# Altium PCB PCB.PcbDoc
Units mil, origin at the board's own origin, x right, y up, seen from the top; angles counter-clockwise.
Board outline 1586.38 x 1777.43 mil, 2 copper layers (Top Layer, Bottom Layer); 48 components, 31 nets, 178 pads, 66 vias.
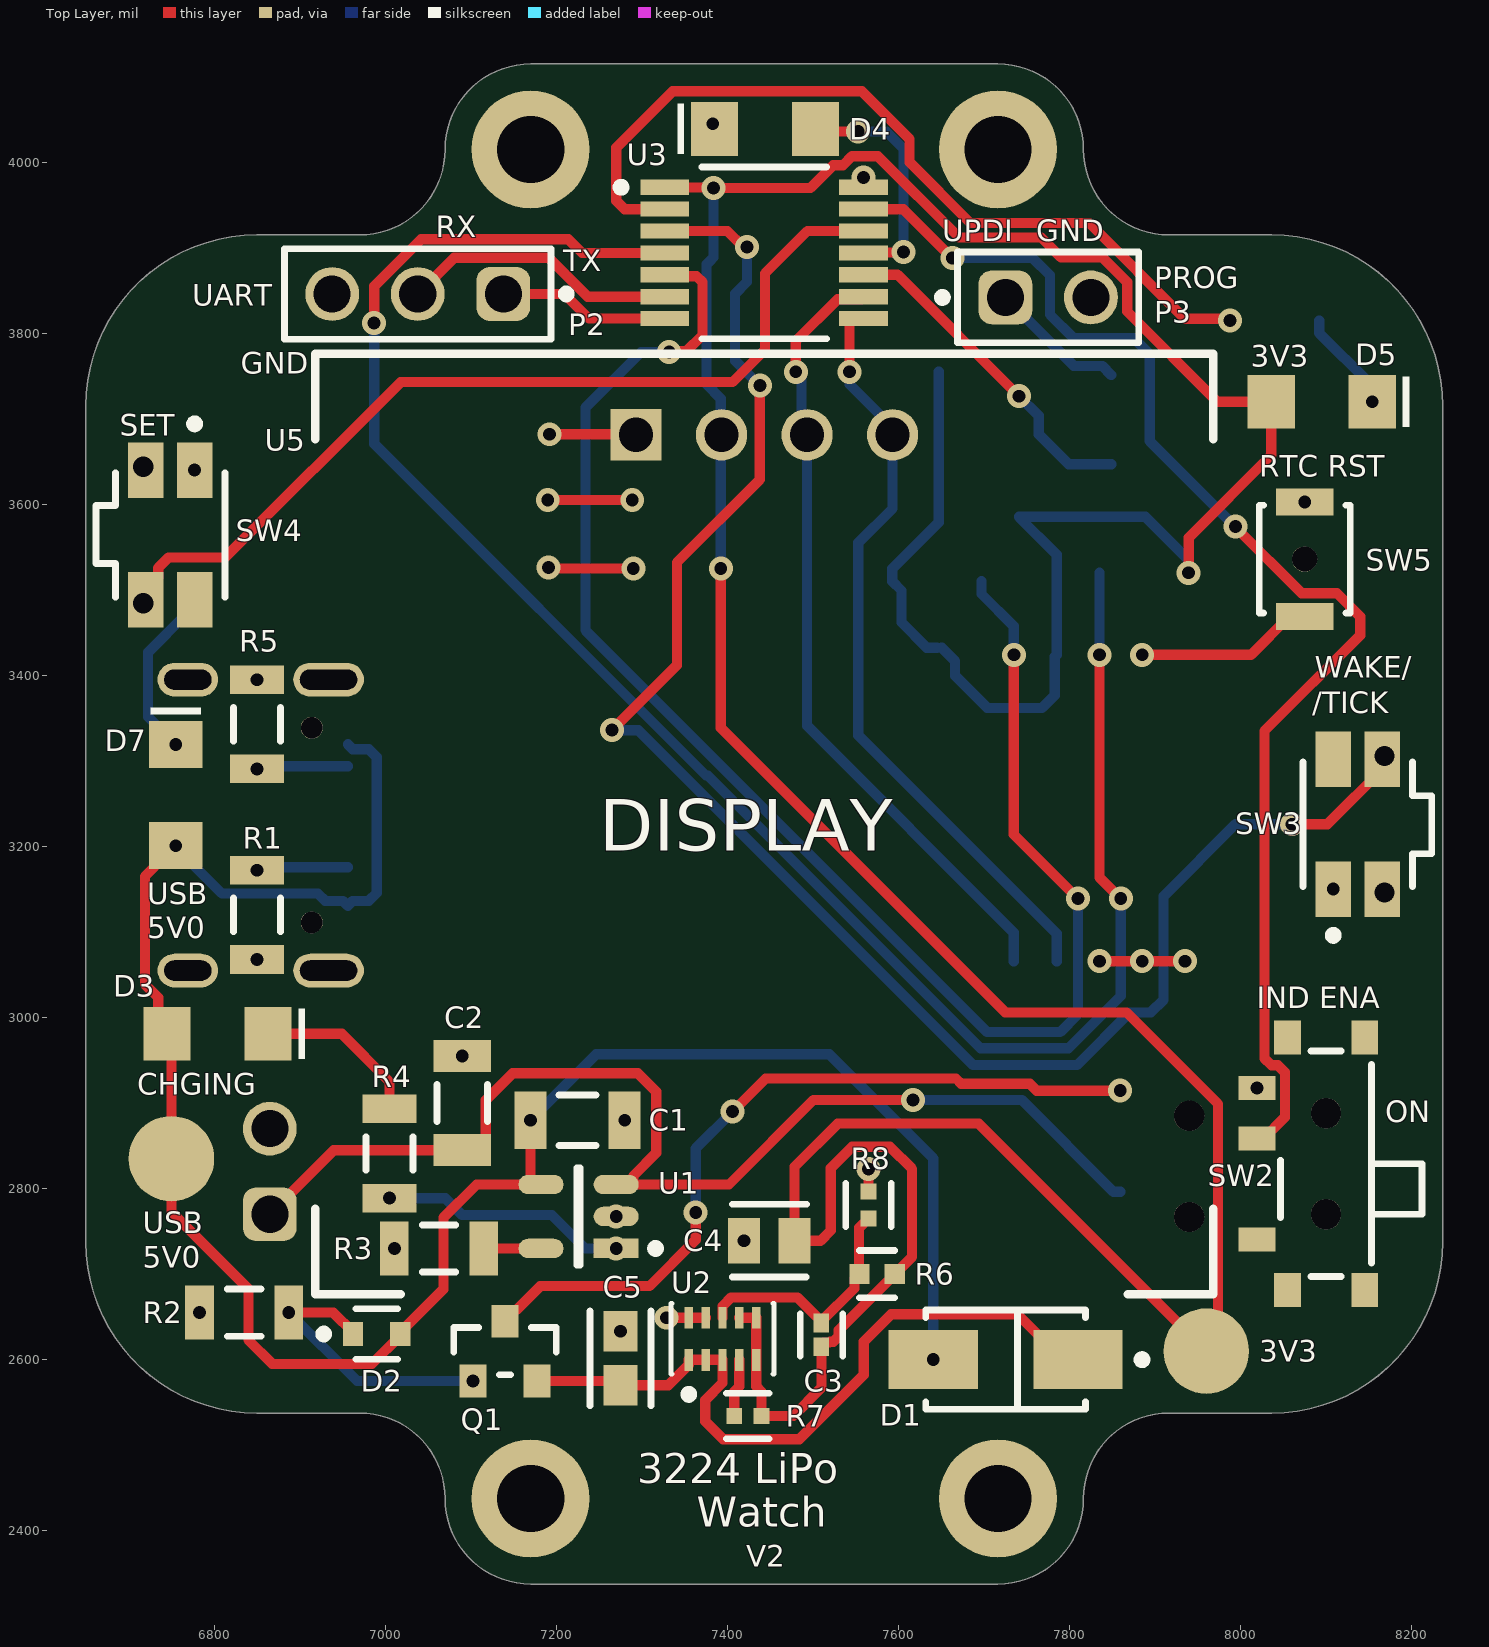
[diagram p0: Top Layer view]
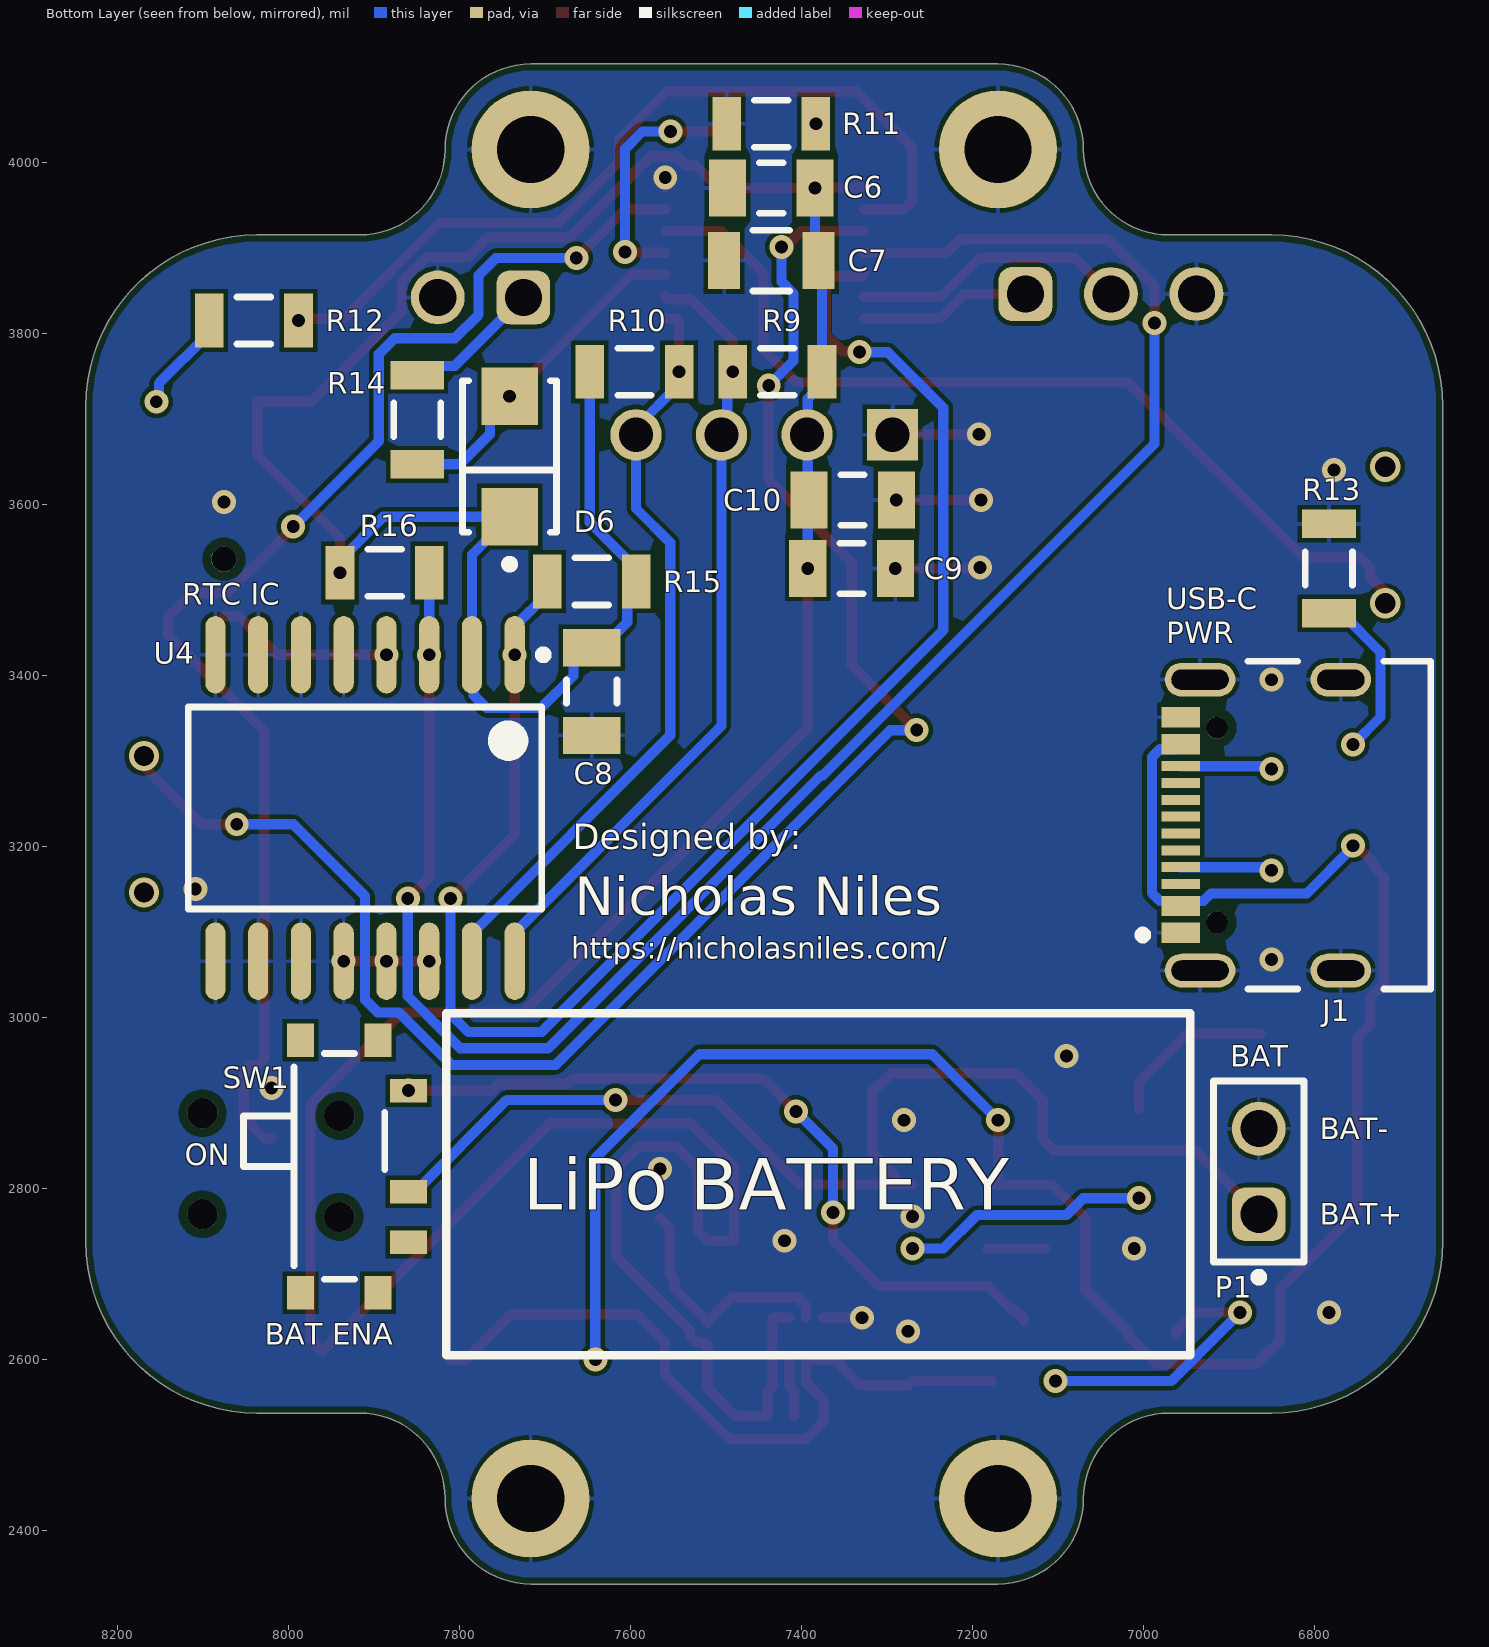
[diagram p1: Bottom Layer view, seen from below]
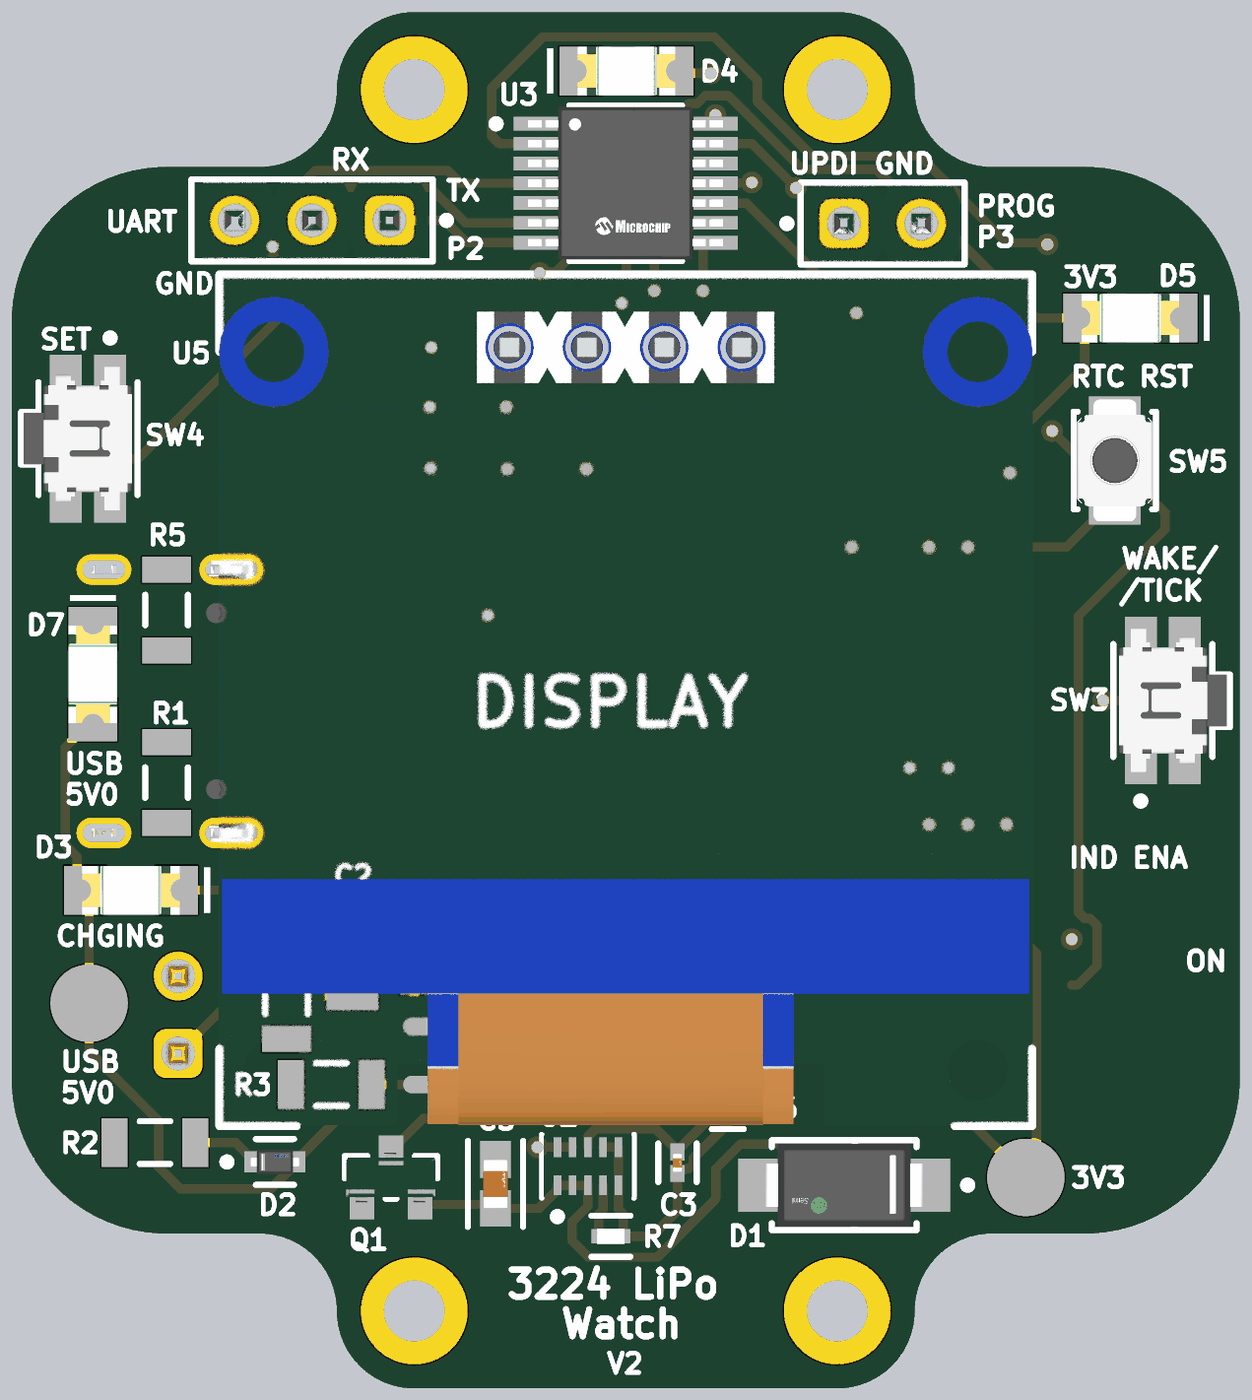
[diagram p2: 3D render of the assembled board from above, using the file's embedded part models]

## Layer stack, top to bottom
Top Solder: solder mask 0.4, Solder Resist, Dk 3.5
Top Layer: signal copper 1.4
Dielectric 1: dielectric 12.6, FR-4, Dk 4.8
Bottom Layer: signal copper 1.4
Bottom Solder: solder mask 0.4, Solder Resist, Dk 3.5

## Board outline
6650,2737.57 ccw(c6850,2737.57) 6850,2537.57 6970,2537.57 cw(c6970,2437.57) 7070,2437.57 ccw(c7170,2437.57) 7170,2337.57 7716.38,2337.57 ccw(c7716.38,2437.57) 7816.38,2437.57 cw(c7916.38,2437.57) 7916.38,2537.57 8036.38,2537.57 ccw(c8036.38,2737.57) 8236.38,2737.57 8236.38,3715 ccw(c8036.38,3715) 8036.38,3915 7916.38,3915 cw(c7916.38,4015) 7816.38,4015 ccw(c7716.38,4015) 7716.38,4115 7170,4115 ccw(c7170,4015) 7070,4015 cw(c6970,4015) 6970,3915 6850,3915 ccw(c6850,3715) 6650,3715

## Design rules (kind name [scope] priority, off if disabled: settings)
BoardOutlineClearance [All] p1: gap=7.87 ignorepadtopadclearanceinfootprint=FALSE
Clearance [All] p1: gap=5 ignorepadtopadclearanceinfootprint=TRUE except(10: Arc-Hole Track-Hole SMDPad-Hole THPad-Hole Via-Hole Fill-Hole Poly-Hole Region-Hole Text-Hole)
ComponentClearance [All] p1: gap=5 collisioncheckmode=3 verticalgap=5 showdistances=TRUE
DiffPairsRouting [All] p1: maxlimit=10 minlimit=5 mostfreqgap=5 toplayer_minwidth=5 toplayer_maxwidth=1000 toplayer_prefwidth=5 bottomlayer_minwidth=5 bottomlayer_maxwidth=1000 bottomlayer_prefwidth=5 maxuncoupledlength=500
Height [All] p1: minheight=0 maxheight=71497.94 prefheight=500
HoleSize [All] p1: absolutevalues=TRUE maxlimit=248.03 minlimit=11.81 maxpercent=80.000 minpercent=20.000
HoleToHoleClearance [All] p1: gap=10 allowstackedmicrovias=FALSE
MinimumAnnularRing [All] p1: minimumring=6
MinimumSolderMaskSliver [All] p1: minsoldermaskwidth=6
PlaneClearance [All] p1: clearance=5
PlaneConnect PlaneConnectPowerPads [InPadClass('PowerPads')] p1: planeconnectstyle=Direct reliefexpansion=20 reliefentries=4 reliefconductorwidth=10 reliefairgap=10
PlaneConnect [All] p2: pad.planeconnectstyle=Relief pad.reliefexpansion=11.81 pad.reliefentries=4 pad.reliefconductorwidth=5 pad.reliefairgap=5 via.planeconnectstyle=Direct via.reliefexpansion=11.81 via.reliefentries=4 via.reliefconductorwidth=5 via.reliefairgap=5
PolygonConnect PolygonConnectPowerPads [All vs (InPadClass('PowerPads'))] p1: connectstyle=Direct reliefconductorwidth=10 reliefentries=4 polygonreliefangle="90 Angle" airgapwidth=10
PolygonConnect [All] p2: thpad.connectstyle=Relief thpad.reliefconductorwidth=5 thpad.reliefentries=4 thpad.polygonreliefangle="90 Angle" thpad.airgapwidth=5 smdpad.connectstyle=Relief smdpad.reliefconductorwidth=5 smdpad.reliefentries=4 smdpad.polygonreliefangle="90 Angle" smdpad.airgapwidth=5 via.connectstyle=Direct via.reliefconductorwidth=5 via.reliefentries=4 via.polygonreliefangle="90 Angle" via.airgapwidth=5
RoutingVias [All] p1: holewidth=11.81 width=23.62 viastyle="Through Hole" minholewidth=11.81 minwidth=23.62 maxholewidth=23.62 maxwidth=259.84
SilkToSilkClearance [All] p1: silktosilkclearance=5
SilkToSolderMaskClearance [IsPad] p1: minsilkscreentomaskgap=5 clearancetoexposedcopper=TRUE
SolderMaskExpansion [All] p1: expansion=2 istentingtop=FALSE
SupplyNets "Schematic Supply Nets_4" [InNet('GND')] p1: voltage=0.000
SupplyNets "Schematic Supply Nets_3" [InNet('3V3')] p2: voltage=0.000
SupplyNets "Schematic Supply Nets_2" [InNet('BAT_VCC')] p3: voltage=0.000
SupplyNets "Schematic Supply Nets_1" [InNet('BUCK_IN')] p4: voltage=0.000
SupplyNets "Schematic Supply Nets" [InNet('USB_VCC')] p5: voltage=0.000
UnRoutedNet [All] p1: checkbadconnections=TRUE
Width Width_10mil [All] p1: maxlimit=12 minlimit=12 preferedwidth=12 minimp=50.000000 maximp=50.000000 favimp=50.000000
Width Width_6mil [All] p2: maxlimit=1000 minlimit=6 preferedwidth=6 minimp=50.000000 maximp=50.000000 favimp=50.000000
Width Power_20mil [All] p3: maxlimit=1000 minlimit=20 preferedwidth=20 minimp=50.000000 maximp=50.000000 favimp=50.000000
Width Power_12mil [All] p4: maxlimit=1000 minlimit=12 preferedwidth=12 minimp=50.000000 maximp=50.000000 favimp=50.000000
Width Width_5mil [All] p5: maxlimit=1000 minlimit=5 preferedwidth=5 minimp=50.000000 maximp=50.000000 favimp=50.000000
19 further rules are at their usual default settings.

## Classes and differential pairs
component class "RTC IC": C8 R15 R16 SW5 U4
component class Microcontroller: C6 C7 D4 D5 D6 D7 P2 P3 R9 R10 R11 R12 R13 R14 SW2 SW3 SW4 U3
component class "LiPo BMS": B1 C1 C2 C3 C4 C5 D1 D2 D3 J1 P1 Q1 R1 R2 R3 R4 R5 R6 R7 R8 SW1 U1 U2
component class Display: C9 C10 U5

## Components (designator, comment, footprint, x,y, rotation, side; value= is the part's Value field where it differs from the comment)
C1 "4.7µF" CAPC1206(3216)190_L 7224.88,2880 r180 top value=4.7uF
C2 "4.7µF" CAPC1206(3216)190_L 7090,2900 r270 top value=4.7uF
C3 "Cff" FP-GRM033-0_03-IPC_A 7510,2628.95 r90 top
C4 "Cout" FP-C0805C-DG-MFG 7449,2739 r180 top value=10uF
C5 "Cin" FP-GRM188-0_1-e0_2_0_55-IPC_A 7275,2601.57 r90 top
C6 "0.1µF" CAPC3216X100X50LL20T25 7435,3970 r180 bottom
C7 "10nF" FP-C1206C-EB-MFG 7435,3885 r0 bottom value="10,000 pF"
C8 "1µF" CAPC3216X110X50LL20T25 7645,3381.18 r90 bottom
C9 "1µF" CAPC3216X110X50LL20T25 7341.18,3525 r0 bottom
C10 "0.1µF" CAPC3216X100X50LL20T25 7340,3605 r0 bottom
D1 "SS14" FP-403AE-MFG 7725.35,2600 r0 top
D2 "1N4148WT-7" FP-SOD523-MFG 6990,2630 r0 top
D3 "150120GS75000" WL-SMCW_1206_150120xx75000 6804,2981 r180 top
D4 "150120RS75000" WL-SMCW_1206_150120xx75000 7444,4039 r0 top locked
D5 "150120GS75000" WL-SMCW_1206_150120xx75000 8095,3720 r180 top
D6 "SS14-E3/61T" FP-95400-MFG 7741,3656 r90 bottom
D7 "150120YS75000" WL-SMCW_1206_150120xx75000 6755,3260 r270 top
J1 "USB4105-GF-A" FP-USB4105-GF-A-MFG 6815,3225 r90 bottom locked
P1 "61300211121" 61300211121 6865,2820 r90 bottom
P2 "61300311121" 61300311121 7038,3846 r180 top
P3 "61300211121" 61300211121 7775,3842 r0 top
Q1 "IRLML6402TRPBF" FP-Micro3-MFG 7140,2610 r90 top
R1 "5.1kΩ" RESC3116X65X40LL10T20 6850,3120 r270 top
R2 "10kΩ" RESC3116X65X40LL10T20 6835,2655 r0 top
R3 "33kΩ" RESC3116X65X40LL10T20 7062.83,2730 r0 top
R4 "1kΩ" RESC3116X65X40LL10T20 7005,2841 r90 top
R5 "5.1kΩ" RESC3116X65X40LL10T20 6850,3342.83 r90 top
R6 "Rfbt" FP-CRCW0402-e3-MFG 7575,2700 r0 top
R7 "Rpg" FP-CRCW0402-e3-IPC_C 7424,2534 r180 top
R8 "Rfbb" FP-CRCW0402-e3-IPC_C 7565,2780.83 r270 top
R9 "10kΩ" RESC3116X65X40LL10T20 7427.83,3755 r180 bottom
R10 "10kΩ" RESC3116X65X40LL10T20 7595,3755 r0 bottom
R11 "1kΩ" RESC3116X65X40LL10T20 7435,4045 r180 bottom
R12 "1kΩ" RESC3116X65X40LL10T20 8040,3815 r180 bottom
R13 "1kΩ" RESC3116X65X40LL10T20 6783,3525 r90 bottom
R14 "1kΩ" RESC3116X65X40LL10T20 7849,3699 r90 bottom
R15 "10kΩ" RESC3116X65X40LL10T20 7645,3510 r180 bottom
R16 "10kΩ" RESC3116X65X40LL10T20 7887.17,3520 r0 bottom
SW1 "450404015514" 450404015514 57940,52825.94 r90 bottom
SW2 "450404015514" 450404015514 58100,-47170.94 r270 top locked
SW3 "EVQ-9P701P" FP-EVQ-9P701P-MFG 8137,3226 r270 top locked
SW4 "EVQ-9P701P" FP-EVQ-9P701P-MFG 6748.54,3564.21 r90 top locked
SW5 "RST" FP-B3U-1000P-B-MFG 8075,3536 r270 top
U1 "MCP73831T-2ACI/OT" FP-C04-091-OT-IPC_B 7226.05,2767.4 r180 top
U2 "TPSM82823SILR" SIL0010D-MFG 7394.31,2624.39 r90 top
U3 "ATTINY3224-XU" FP-C04-087-ST-MFG 7443,3894 r0 top locked
U4 "DS3231SN/T&R" W16-H2_N 7910,3245 r270 bottom locked
U5 "128x64 OLED" "OLED Display Module" 7443.19,3226.29 r0 top locked

## Footprints (in the part's own frame and the unit in brackets; to place one, negate y for a bottom-side part, rotate by r counter-clockwise, add the part's x,y. Pads: shape width x height; smd on the part's side, far side on the other; paste and mask are expansions set on the pad)
61300211121 [mm] "Pin Header, pitch 2.54 mm, THT, Vertical, single row, 2p"
  rrect50% 1.6x1.6 hole 1.1: 1(-1.27,0)
  round 1.6 hole 1.1: 2(1.27,0)
  silkscreen extent -3.26,-1.35 2.69,1.35, body extent -2.54,-1.27 2.54,1.27, height 8.57
61300311121 [mm] "Pin Header, pitch 2.54 mm, THT, Vertical, single row, 3p"
  rrect50% 1.6x1.6 hole 1.1: 1(-2.54,0)
  round 1.6 hole 1.1: 2(0,0) 3(2.54,0)
  silkscreen extent -4.53,-1.35 3.96,1.35, body extent -3.81,-1.27 3.81,1.27, height 8.57
450404015514 [mm] "Right angle Slide Switch"
  rect 0.7x1.1 smd: COM(-1270.75,-1272.05) L1(-1267.75,-1272.05) L2(-1272.25,-1272.05)
  round 0.9 hole 0.9 unplated: M1(-1271.5,-1270) M2(-1268.5,-1270)
  rect 1x0.8 smd: M3(-1273.75,-1268.85) M4(-1266.25,-1268.85) M5(-1273.75,-1271.15) M6(-1266.25,-1271.15)
  silkscreen extent -1273.35,-1271.35 -1266.65,-1267.15, body extent -1273.85,-1272.25 -1266.15,-1267.12, height 1.4
CAPC1206(3216)190_L [mm] "Chip Capacitor, Body 3.2x1.6mm, Height 1.9mm, IPC High Density"
  rect 0.95x1.7 smd: 1(-1.4,0) 2(1.4,0)
  silkscreen extent -0.55,-0.75 0.55,0.75, body extent -1.7,-0.9 1.7,0.9, height 1.9
CAPC3216X100X50LL20T25 [mm] "Chip Capacitor, 2-Leads, Body 3.4x1.8mm, IPC High Density"
  rect 1.1x1.7 smd: 1(-1.3,0) 2(1.3,0)
  silkscreen extent -0.35,-0.75 0.35,0.75, body extent -1.7,-0.9 1.7,0.9, height 1
CAPC3216X110X50LL20T25 [mm] "Chip Capacitor, 2-Leads, Body 3.20x1.60mm, IPC High Density"
  rect 1.1x1.7 smd: 1(-1.3,0) 2(1.3,0)
  silkscreen extent -0.35,-0.75 0.35,0.75, body extent -1.7,-0.9 1.7,0.9, height 1.1
FP-403AE-MFG [mm]
  rect 2.65x1.75 smd paste+0 mask+0: 1(-2.15,0) 2(2.15,0)
  silkscreen extent -2.37,-1.48 4.18,1.48, body extent -3.57,-1.58 3.57,1.58, height 0.25
FP-95400-MFG [mm]
  rect 1.7x1.68 smd paste+0 mask+0: 1(-1.79,0) 2(1.79,0)
  silkscreen extent -3.32,-1.4 2.25,1.4, body extent -2.55,-1.34 2.55,1.33, height 2.29
FP-B3U-1000P-B-MFG [mm]
  rect 0.8x1.7 smd paste+0 mask+0: 1(-1.7,0) 2(1.7,0)
  round 0.75 hole 0.75 unplated paste-2539.97 mask+0: ""(0,0)
  silkscreen extent -1.6,-1.35 1.6,1.35, body extent -2,-1.25 2,1.25, height 1.75
FP-C04-087-ST-MFG [mm]
  rect 1.45x0.45 smd paste+0 mask+0: 1(-2.95,1.95) 2(-2.95,1.3) 3(-2.95,0.65) 4(-2.95,0) 5(-2.95,-0.65) 6(-2.95,-1.3) 7(-2.95,-1.95) 8(2.95,-1.95) 9(2.95,-1.3) 10(2.95,-0.65) 11(2.95,0) 12(2.95,0.65) 13(2.95,1.3) 14(2.95,1.95)
  silkscreen extent -4.37,-2.55 1.85,2.55, body extent -3.2,-2.5 3.2,2.5, height 1.2
FP-C04-091-OT-IPC_B [mm]
  rect 1.338x0.578 smd paste+0 mask+0: 1(-1.116,0.95)
  rrect100% 1.338x0.578 smd paste+0 mask+0: 2(-1.116,0) 3(-1.116,-0.95) 4(1.116,-0.95) 5(1.116,0.95)
  silkscreen extent -2.41,-1.45 0.05,1.45
FP-C0805C-DG-MFG [mm]
  rect 0.95x1.35 smd paste+0 mask+0: 1(-0.75,0) 2(0.75,0)
  silkscreen extent -1.11,-1.08 1.1,1.07, body extent -1.4,-0.85 1.4,0.85, height 0.25
FP-C1206C-EB-MFG [mm]
  rect 0.95x1.7 smd paste+0 mask+0: 1(-1.4,0) 2(1.4,0)
  silkscreen extent -0.55,-0.9 0.55,0.9, body extent -1.6,-0.8 1.6,0.8, height 0.88
FP-CRCW0402-e3-IPC_C [mil]
  rect 18.43x18.6 smd paste+0 mask+0: 1(-15.83,0) 2(15.83,0)
  silkscreen extent -25,-27 25,27, body extent -29,-15 29,15, height 10
FP-CRCW0402-e3-MFG [mm]
  rect 0.6x0.6 smd paste+0 mask+0: 1(-0.525,0) 2(0.525,0)
  silkscreen extent -0.53,-0.7 0.53,0.7, body extent -0.5,-0.25 0.5,0.25, height 0.4
FP-EVQ-9P701P-MFG [mm]
  rect 1.65x1.05 smd paste+0 mask+0: 1(1.925,-0.725) 1'(-1.925,-0.725) 2(1.925,0.725) 2'(-1.925,0.725)
  silkscreen extent -1.85,-1.63 3.42,2.2, body extent -2.85,-1.65 2.85,2.3, height 0.25
FP-GRM033-0_03-IPC_A [mil]
  rect 21.82x18.22 smd paste+0 mask+0: 1(-13.95,0) 2(13.95,0)
  silkscreen extent -25,-25 25,25, body extent -33,-17 33,17, height 10
FP-GRM188-0_1-e0_2_0_55-IPC_A [mil]
  rect 47.57x39.85 smd paste+0 mask+0: 1(-31.57,0) 2(31.57,0)
  silkscreen extent -55,-36 55,36, body extent -31,-16 31,16, height 36
FP-Micro3-MFG [mm]
  rect 0.972x0.802 smd paste+0 mask+0: 1(-0.885,0.95) 2(-0.885,-0.95) 3(0.885,0)
  silkscreen extent -0.7,-1.52 0.7,1.52, body extent -1.47,-1.87 1.47,1.87, height 0.25
FP-SOD523-MFG [mm]
  rect 0.6x0.7 smd paste+0 mask+0: 1(-0.7,0) 2(0.7,0)
  silkscreen extent -1.7,-0.75 0.63,0.75, body extent -0.8,-0.4 0.8,0.4, height 0.65
FP-USB4105-GF-A-MFG [mm]
  rrect100% 1x2.1 hole 1.7 slot 0.6 at 0 deg paste-2539.97 mask+0: 1(-4.32,3.015) 2(4.32,3.015)
  rrect100% 1x1.8 hole 1.4 slot 0.6 at 0 deg paste-2539.97 mask+0: 3(-4.32,-1.165) 4(4.32,-1.165)
  rect 0.6x1.15 smd paste+0 mask+0: A1-B12(-3.2,3.59) A4-B9(-2.4,3.59) B1-A12(3.2,3.59) B4-A9(2.4,3.59)
  rect 0.3x1.15 smd paste+0 mask+0: A5(-1.25,3.59) A6(-0.25,3.59) A7(0.25,3.59) A8(1.25,3.59) B5(1.75,3.59) B6(0.75,3.59) B7(-0.75,3.59) B8(-1.75,3.59)
  round 0.65 hole 0.65 unplated paste-2539.97 mask+0: ""(-2.89,2.515) ""(2.89,2.515)
  silkscreen extent -4.86,-3.84 4.86,4.84, body extent -4.79,-3.76 4.79,3.77, height 3.26
"OLED Display Module" [mil] "Hosyond 0.96 Inch OLED I2C Display Module 128x64 Pixel OLED Display"
  rect 60x60 hole 40: 1(-150,455)
  round 60 hole 40: 2(-50,455) 3(50,455) 4(150,455)
  silkscreen extent -525,-550 525,550, body extent -526,-548 526,548, height 198
RESC3116X65X40LL10T20 [mm] "Chip Resistor, 2-Leads, Body 3.10x1.60mm, IPC High Density"
  rect 0.85x1.6 smd: 1(-1.325,0) 2(1.325,0)
  silkscreen extent -0.5,-0.7 0.5,0.7, body extent -1.6,-0.85 1.6,0.85, height 0.65
SIL0010D-MFG [mm]
  rect 0.65x0.25 smd paste+0 mask+0: 1(-0.625,1) 2(-0.625,0.5) 3(-0.625,0) 4(-0.625,-0.5) 5(-0.625,-1) 6(0.625,-1) 7(0.625,-0.5) 8(0.625,0) 9(0.625,0.5) 10(0.625,1)
  silkscreen extent -1.77,-1.53 1.05,1.53
W16-H2_N [mm] "SOIC, 16-Leads, Body 10.3x7.5mm, Pitch 1.27mm, IPC Medium Density"
  oval 2.3x0.6 smd: 1(-4.55,4.445) 2(-4.55,3.175) 3(-4.55,1.905) 4(-4.55,0.635) 5(-4.55,-0.635) 6(-4.55,-1.905) 7(-4.55,-3.175) 8(-4.55,-4.445) 9(4.55,-4.445) 10(4.55,-3.175) 11(4.55,-1.905) 12(4.55,-0.635) 13(4.55,0.635) 14(4.55,1.905) 15(4.55,3.175) 16(4.55,4.445)
  silkscreen extent -4.67,-5.25 3,5.42, body extent -3.8,-5.25 3.8,5.25, height 2.65
WL-SMCW_1206_150120xx75000 [mm] "SMD Mono-color Chip LED, body 3.2x1.6mm"
  rect 1.4x1.6 smd: 1(-1.5,0) 2(1.5,0)
  silkscreen extent -2.6,-0.75 -2.4,0.75, body extent -1.6,-0.8 1.6,0.8, height 0.68

## Part data
C1 C2: library part CMP-1037-04917-1, "CAP 4.7uF 25V ±5% 1206 (3216 Metric) Thickness 1.9mm SMD", Case-EIA=1206, Case-Metric=3216, Rated Voltage="25 V", Tolerance=Â±5%, Max Thickness="1.9 mm", Technology=SMT
C3: library part CMP-2010-01296-2, "Chip Multilayer Ceramic Capacitors for General Purpose, 0201, 120pF, X7R, 15%, 10%, 25V", Capacitance=120pF, Case Code (Imperial)=0201, Case Code (Metric)=0603, Dielectric=X7R, Max Operating Temperature=125°C, Min Operating Temperature=-55°C, Package Quantity=1, Tolerance=10%, Voltage Rating=25V, Case/Package=0201, Construction=Flat, Depth=0.3mm, Height=0.3mm, Lead Free="Lead Free", Length=0.6mm, Mount="Surface Mount", Packaging="Tape and Reel", Radiation Hardening=No, Series=GRM, Termination=SMD/SMT, Thickness=0.013inch, Voltage Rating (DC)=25V, Width=0.012inch
C4: library part CMP-2007-03243-2, "CAP CER 10UF 10V X5R 0805", 3DS Part Number=220-00001, Capacitance=10uF, Manufacturer=Kemet, Manufacturer Part Number=C0805C106K8PACTU, Package=C0805C-DG, Temperature="-55°C to +85°C", Temperature Characteristic=X5R, Temperature Coefficient=15%, Temperature Range High=+85°C, Temperature Range Low=-55°C, Tolerance=10%, Voltage=10V, Automotive=No, Category=Cap, ComponentLink2Description=Datasheet, ComponentLink2URL=https://content.kemet.com/datasheets/KEM_C1006_X5R_SMD.pdf, Device Class L1="Passive Components", Device Class L2=Capacitors, Device Class L3="Ceramic Capacitors", Digikey Description="CAP CER 10UF 10V X5R 0805", Height=1.4mm, Ipc Land Pattern Name=CAPC200125X125, Lead Free=Yes, Material=Ceramic, Mouser Description="CAP CER 10UF 10V X5R 0805", Octopart=https://octopart.com/c0805c106k8pactu-kemet-98697, RoHS=TRUE, Voltage Rating=10V
C5: library part CMP-2006-02792-2, "Chip Multilayer Ceramic Capacitors for General Purpose, 0603, 10uF, X5R, 15%, 20%, 6.3V", Capacitance=10uF, Case Code (Imperial)=0603, Case Code (Metric)=1608, Dielectric=X5R, Max Operating Temperature=85°C, Min Operating Temperature=-55°C, Package Quantity=4000, Tolerance=20%, Voltage=6.3V, Case/Package=0603, Depth=0.8mm, Height=0.8mm, Lead Free="Lead Free", Length=1.6mm, Material=Ceramic, Mount="Surface Mount", Packaging="Tape and Reel", Radiation Hardening=No, REACH SVHC="No SVHC", Termination=SMD/SMT, Thickness=0.035inch, Voltage Rating=6.3V, Voltage Rating (DC)=6.3V, Width=0.031inch
C6 C10: library part CMP-1664-00001-4, "Chip Capacitor, 100 nF, +/- 10%, 25 V, -55 to 125 degC, 1206 (3216 Metric), RoHS, Tape and Reel", Manufacturer=Kemet, Max Operating Temperature="125 degC", Min Operating Temperature="-55 degC", Package Quantity=4000, Voltage Rating="25 V", ComponentLink1Description="Manufacturer URL", ComponentLink1URL=http://www.kemet.com/, ComponentLink2Description=Datasheet, ComponentLink2URL=http://www.kemet.com/docfinder?Partnumber=C1206F104K3RACTU, DatasheetVersion=02/2016, Height="0.78 mm", Length="3.2 mm", Mounting Technology="Surface Mount", PackageDescription="2-Pin Surface Mount Device, Body 3.2 x 1.6 mm", PackageReference=1206, Packaging="Tape and Reel", REACH SVHC="No SVHC", RoHSCompliant=true
C7: library part CMP-03020-003656-1, "CAP CER 10000PF 100V X7R 1206", Capacitance="10,000 pF", Manufacturer=KEMET, Manufacturer Part Number=C1206C103J1RACTU, Package=C1206C-EB, Temperature="-55°C to +150°C", Temperature Characteristic=X7R, Temperature Coefficient=15%, Temperature Range High=+150°C, Temperature Range Low=-55°C, Tolerance=0.05, Voltage Rating="100 V", Automotive=Yes, Automotive Grade="Grade 0", Category=Cap, ComponentLink2Description=Datasheet, ComponentLink2URL=https://content.kemet.com/datasheets/KEM_C1007_X8R_ULTRA_150C_SMD.pdf, Device Class L1="Passive Components", Device Class L2=Capacitors, Device Class L3="Ceramic Capacitors", Digikey Description="CAP CER 10000PF 100V X7R 1206", Height=0.88mm, Ipc Land Pattern Name=CAPC320160X78, Lead Free=Yes, Material=Ceramic, Mouser Description="1206 C 10nF Ceramic Multilayer Capacitor, 100 VDC, +125degC, X7R Dielec, +/-5%", Octopart=https://octopart.com/c1206c103j1ractu-kemet-121270, RoHS=TRUE
C8 C9: library part CMP-2000-06011-1, "Chip Capacitor, 1 uF, +/- 10%, 50 V, -55 to 125 degC, 1206 (3216 Metric), RoHS, Tape and Reel", Capacitance=1uF, Capacitance - nF=1000nF, Case Code - in=1206, Case Code - mm=3216, Case Height=1mm, Case Length=3.2mm, Case Width=1.6mm, Dielectric=X7R, Manufacturer=Kemet, Maximum Operating Temperature=+125C, Minimum Operating Temperature=-55C, Operating Temperature Range=-55Cto+125C, Package / Case=1206(3216metric), Package Description="2-Pin Surface Mount Device, Body 3.2 x 1.6 mm", Temperature Coefficient / Code=+/-15%, Tolerance=10%, Voltage Rating=50V, Brand=Kemet, Class=Class1, Datasheet URL=http://www.kemet.com/docfinder?Partnumber=C1206C105K5RACTU, Datasheet Version=02/2016, Dimensions=1.6mmWx3.2mmLx1mmH, Factory Pack Quantity=2500, Manufacturer URL=http://www.kemet.com/, Mounting Technology=SurfaceMount, Package Reference=1206, Packaging=Reel, Product=GeneralTypeMLCCs, Product Category=MultilayerCeramicCapacitorsMLCC-SMD/SMT, RoHS=Details, Series=C1206C, Termination Style=SMD/SMT, Type=SMDMLCCX7R6.3-250VDCCommericalGrade, Voltage Rating DC=50V
D1: library part CMP-2000-04943-2, "DIODE SCHOTTKY 40V 1A SMA", Forward Current=1A, Manufacturer="ON Semiconductor", Max Junction Temp=+125°C, Max Repetitive Reverse Voltage=40V, Max Surge Forward Current=40A, Package=403AE, Peak Reverse Current=0.2mA, Temperature="-65°C to +125°C", Temperature Range Low=-65°C, Automotive=No, Category=Diode, ComponentLink2Description=Datasheet, ComponentLink2URL=https://www.onsemi.com/pub/Collateral/SS19-D.PDF, Device Class L1="Discrete Semiconductors", Device Class L2=Diodes, Device Class L3="Schottky Diodes", Digikey Description="DIODE SCHOTTKY 40V 1A SMA", Height=2.5mm, Lead Free=Yes, Manufacturer Part Number=SS14, Mouser Description="Schottky Diodes & Rectifiers SMA 40V 1.0A", Octopart=https://octopart.com/ss14-on+semiconductor-29205033, RoHS=TRUE, Standoff Height=0.05mm, Temperature Range High=+125°C
D2: library part CMP-2000-05518-3, "DIODE GEN PURP 80V 125MA SOD523", Average Rectified Current=125mA, Capacitance=2pF, Forward Current=250mA, Forward Voltage=1.25V, Max Forward Surge Current (Ifsm)=2A, Max Operating Temperature=150°C, Max Repetitive Reverse Voltage (Vrrm)=100V, Max Reverse Voltage (DC)=80V, Min Operating Temperature=-65°C, Package Quantity=3000, Peak Reverse Current=1uA, Power Dissipation=150mW, Contact Plating=Tin, Current Rating=125mA, Element Configuration=Single, Height=0.65mm, Lead Free="Lead Free", Length=0.9mm, Max Surge Current=2A, Mount="Surface Mount", Number of Pins=2, Output Current=125mA, Packaging="Tape and Reel", Peak Non-Repetitive Surge Current=2A, Polarity=Standard, Power Rating=150mW, Radiation Hardening=No, REACH SVHC="No SVHC", Recovery Time=4ns, Reverse Recovery Time=4ns, Voltage Rating (DC)=80V, Weight=3.5E-05oz, Width=1.3mm
D3 D5: library part CMP-1426-00014-4, "WL-SMCW SMT Mono-Color Chip LED Waterclear", Case Code (Imperial)=1206, Case Code (Metric)=3216, Color=Green, Forward Current=100mA, Forward Voltage=3.2V, Max Junction Temperature (Tj)=95°C, Max Operating Temperature=85°C, Max Reverse Voltage (DC)=5V, Min Operating Temperature=-40°C, Power Dissipation=105mW, Test Current=20mA, Case/Package=1206, Dominant Wavelength=525nm, Height=680µm, Length=3.2mm, Lens Style="Clear, Rectangular", Luminous Intensity=450mcd, Mount="Surface Mount", Packaging="Tape and Reel", Peak Wavelength=515nm, REACH SVHC=Unknown, Reverse Voltage=5V, RoHS=Compliant, Viewing Angle=140°, Wavelength=525nm, Width=1.6mm
D4: library part CMP-1426-00013-4, "WL-SMCW SMT Mono-Color Chip LED Waterclear", Case Code (Imperial)=1206, Case Code (Metric)=3216, Color=Red, Forward Current=100mA, Forward Voltage=2V, Max Junction Temperature (Tj)=95°C, Max Operating Temperature=85°C, Max Reverse Voltage (DC)=5V, Min Operating Temperature=-40°C, Power Dissipation=72mW, Test Current=20mA, Case/Package=1206, Dominant Wavelength=625nm, Height=680µm, Length=3.2mm, Lens Style="Clear, Rectangular", Luminous Intensity=150mcd, Mount="Surface Mount", Packaging="Tape and Reel", Peak Wavelength=630nm, REACH SVHC=Unknown, Reverse Voltage=5V, RoHS=Compliant, Viewing Angle=140°, Wavelength=625nm, Width=1.6mm
D6: library part CMP-02539-000035-1, "DIODE SCHOTTKY 40V 1A DO214AC", Forward Current=1A, Manufacturer=Vishay, Max Junction Temp=+150°C, Max Repetitive Reverse Voltage=40V, Max Surge Forward Current=40A, Package=95400, Peak Reverse Current=0.2mA, Temperature="-65°C to +150°C", Temperature Range Low=-65°C, Automotive=No, Category=Diode, ComponentLink2Description=Datasheet, ComponentLink2URL=http://www.vishay.com/docs/88746/ss12.pdf, Device Class L1="Discrete Semiconductors", Device Class L2=Diodes, Device Class L3="Schottky Diodes", Digikey Description="DIODE SCHOTTKY 40V 1A DO214AC", Footprint Url=http://www.vishay.com/docs/95400/sma.pdf, Height=2.29mm, Lead Free=Yes, Manufacturer Part Number=SS14-E3/61T, Mouser Description="SS14 Series 40 V 1 A Surface Mount Schottky Barrier Rectifier - DO-214AC (SMA)", Octopart=https://octopart.com/ss14-e3%2F61t-vishay-39552847, RoHS=TRUE, Standoff Height=0mm, Temperature Range High=+150°C
D7: library part CMP-1426-00019-3, "Led, Yellow, 590 Nm, 2 V, 30 Ma, 120 Mcd Rohs Compliant: Yes", Case Code (Imperial)=1206, Case Code (Metric)=3216, Color=Yellow, Forward Current=100mA, Forward Voltage=2V, Max Operating Temperature=85°C, Max Reverse Voltage (DC)=5V, Min Operating Temperature=-40°C, Test Current=20mA, Case/Package=1206, Dominant Wavelength=590nm, Height=680µm, Length=3.2mm, Lens Style="Clear, Rectangular", Luminous Intensity=120mcd, Mount="Surface Mount", Packaging="Tape and Reel", Peak Wavelength=595nm, REACH SVHC=Unknown, RoHS=Compliant, Viewing Angle=140°, Wavelength=590nm, Width=1.6mm
J1: library part CMP-245163-000001-1, "CONN RCPT USB2.0 TYPEC 5A", Current Rating=5/6.25/1.25/0.25A, Manufacturer=GCT, Package=0, Temperature="-40°C to +85°C", Temperature Range High=+85°C, Temperature Range Low=-40°C, Voltage Rating=20V, Automotive=No, Category=Conn, ComponentLink2Description=Datasheet, ComponentLink2URL=https://gct.co/files/drawings/usb4105.pdf, Conn Orientation="Right Angle", Contact Material=Gold,Nickel, Device Class L1=Connectors, Device Class L2="USB Connectors", Device Class L3=unset, Digikey Description="CONN RCPT USB2.0 TYPEC 5A", Height=3.46mm, Is Female=yes, Lead Free=Yes, Manufacturer Part Number=USB4105-GF-A, Number Of Contacts=16, Octopart=https://octopart.com/usb4105-gf-a-gct-106627878, RoHS=TRUE, Usb Standard="USB 2.0"
P1 P3: library part CMP-1712-00002-6, Color=Black, Contact Resistance=20mΩ, Current Rating=3A, Max Operating Temperature=125°C, Min Operating Temperature=-40°C, Operating Supply Voltage=250V, Connector Type="Male Pin", Contact Gender=Male, Contact Material=Copper, Contact Mating Length=5.9944mm, Contact Plating=Gold, Gender=Male, Height=8.94mm, Housing Material=PBT, Lead Free="Lead Free", Lead Pitch=2.54mm, Mount="Through Hole", NexarPartId=20081794, Number Of Contacts=2, Number of Pins=2, Number of Positions=2, Number of Rows=1, Orientation=Vertical, Packaging=Bulk, Pitch=2.54mm, REACH SVHC="No SVHC", RoHS=Compliant, Termination="Through Hole", Voltage Rating=250V
P2: library part CMP-1502-01062-3, Color=Black, Contact Resistance=20mΩ, Current Rating=3A, Max Operating Temperature=105°C, Min Operating Temperature=-40°C, Operating Supply Voltage=250V, Connector Type="Male Pin", Contact Material=Copper, Contact Mating Length=5.9944mm, Contact Plating=Gold, Gender=Male, Height=8.94mm, Lead Free="Lead Free", Lead Pitch=2.54mm, Mount="Through Hole", NexarPartId=32855521, Number Of Contacts=3, Number of Pins=3, Number of Positions=3, Number of Rows=1, Orientation=Vertical, Packaging=Bulk, Pitch=2.54mm, REACH SVHC=Unknown, RoHS=Compliant, Termination=Solder, Voltage Rating=250V
Q1: library part CMP-32901-000130-1, "MOSFET P-CH 20V 3.7A SOT-23", Continuous Drain Current=-3.7A, Drain To Source Breakdown Voltage=-20V, Drain To Source Resistance=0.05Ω, Gate To Source Voltage=12V, Input Capacitace At Vds="633pF @ -10V", Manufacturer=Infineon, Max Forward Diode Voltage=-1.2V, Max Junction Temp=+150°C, Package=Micro3, Power Dissipation=1.3W, Pulse Drain Current=-22A, Temperature="-55°C to +150°C", Temperature Range Low=-55°C, Automotive=No, Category=Trans, ComponentLink2Description=Datasheet, ComponentLink2URL=https://www.infineon.com/dgdl/irlml6402pbf.pdf?fileId=5546d462533600a401535668d5c2263c, Depletion Mode=False, Device Class L1="Discrete Semiconductors", Device Class L2=Transistors, Device Class L3=MOSFETs, Digikey Description="MOSFET P-CH 20V 3.7A SOT-23", Drain To Source Voltage=-20V, Footprint Url=http://irf.com/package/outline/po_micro3.pdf, Gate Charge At Vgs="8nC @ -5V", Height=1.12mm, Ipc Land Pattern Name=SOT95P237X100-3, Lead Free=Yes, Manufacturer Part Number=IRLML6402TRPBF, Number Of Channels=1, Number Of P Channels=1, Octopart=https://octopart.com/irlml6402trpbf-infineon-65874989, Reverse Recovery Charge=11nC, Reverse Recovery Time=29ns, RoHS=TRUE, Rthja Max=75°C/W, Standoff Height=0.01mm, Technology=MOSFET, Temperature Range High=+150°C, Threshold Vgs=-0.55V, Threshold Vgs Max=-1.2V, Threshold Vgs Min=-0.4V, Turn Off Delay Time=588ns, Turn On Delay Time=350ns
R1 R5: library part CMP-2003-03990-1, Manufacturer=Yageo, Part Number=RC1206JR-075K1L
R2 R9 R10 R15 R16: library part CMP-1014-00623-2, "Chip Resistor, 10 KOhm, +/- 1%, 0.25 W, -55 to 155 degC, 1206 (3216 Metric), RoHS, Tape and Reel", Case Code (Imperial)=1206, Case Code (Metric)=3216, Manufacturer=Yageo, Max Operating Temperature=155degC, Min Operating Temperature=-55degC, Package Description="2-Pin Surface Mount Device, Body 3.1 x 1.6 mm", Package Quantity=5000, Package Reference=1206.0, Power Rating=250mW, Resistance=10KOhm, Temperature Coefficient=100ppm/degreesC, Tolerance=1%, Voltage Rating=200V, Case/Package=1206, Composition=ThickFilm, Datasheet URL=http://www.yageo.com/NewPortal/yageodocoutput?fileName=/pdf/R-Chip/PYu-RC_Group_51_RoHS_L_5.pdf, Datasheet Version="Rev. 5, 10/2016", Depth=1.6mm, Height=0.55mm, Lead Free=LeadFree, Length=3.1mm, Manufacturer URL=http://www.yageo.com/, Military Standard=Not, Packaging=TapeandReel, REACH SVHC=Unknown, RoHSCompliant=true, Termination=SMD/SMT, Width=1.6mm
R3: library part CMP-2003-03510-1, Manufacturer=Yageo, Part Number=RC1206JR-1033KL
R4 R11 R12 R13 R14: library part CMP-2100-03678-1, "Chip Resistor, 1 KOhm, +/- 1%, 0.25 W, -55 to 155 degC, 1206 (3216 Metric), RoHS, Tape and Reel", Case Code (Imperial)=1206, Case Code (Metric)=3216, Manufacturer=Yageo, Max Operating Temperature=155degC, Min Operating Temperature=-55degC, Package Description="2-Pin Surface Mount Device, Body 3.1 x 1.6 mm", Package Reference=1206.0, Power Rating=250mW, Resistance=1KOhm, Temperature Coefficient=100ppm/degreesC, Tolerance=1%, Voltage Rating=200V, Case/Package=1206, Composition=ThickFilm, Datasheet URL=http://www.yageo.com/NewPortal/yageodocoutput?fileName=/pdf/R-Chip/PYu-RC_Group_51_RoHS_L_5.pdf, Datasheet Version="Rev. 5, 10/2016", Depth=1.6mm, Height=0.55mm, Lead Free=LeadFree, Length=3.1mm, Manufacturer URL=http://www.yageo.com/, Military Standard=Not, Packaging=TapeandReel, REACH SVHC=Unknown, RoHSCompliant=true, Termination=SMD/SMT
R6: library part CMP-2002-00012-2, "RES Thick Film, 453kΩ, 1%, 0.063W, 100ppm/°C, 0402", Case Code (Imperial)=0402, Case Code (Metric)=1005, Max Operating Temperature=155°C, Max Power Dissipation=63mW, Min Operating Temperature=-55°C, Package Quantity=10, Resistance=453kR, Resistance Tolerance=1%, Resistor Type="Thick Film", Temperature Coefficient=100ppm/°C, Voltage Rating=50V, Case/Package=0402, Construction=Rectangular, Contact Plating=Tin, Depth=0.5mm, Features="Automotive AEC-Q200", Height=0.016inch, Lead Free="Lead Free", Length=1mm, Military Standard=Not, Number of Pins=2, Number of Terminations=2, Packaging="Tape and Reel", Power Rating=63mW, Radiation Hardening=No, RoHS Compliant=Yes, Series=CRCW, Size Code=0402, Termination=SMD/SMT, Tolerance=1%, Voltage Rating (DC)=50V, Weight=2.3E-05oz, Width=0.5mm
R7 R8: library part CMP-2002-08123-3, "RES Thick Film, 100kΩ, 1%, 0.063W, 100ppm/°C, 0402", Case Code (Imperial)=0402, Case Code (Metric)=1005, Max Operating Temperature=155°C, Max Power Dissipation=63mW, Min Operating Temperature=-55°C, Package Quantity=10000, Resistance=100kR, Temperature Coefficient=100ppm/°C, Tolerance=1%, Voltage Rating=50V, Case/Package=0402, Composition="Thick Film", Contact Plating=Tin, Depth=0.5mm, Features="Automotive AEC-Q200", Height=0.35mm, Lead Free="Lead Free", Length=1mm, Military Standard=Not, Mount="Surface Mount", Number of Pins=2, Number of Terminations=2, Packaging="Tape and Reel", Power Rating=63mW, Radiation Hardening=No, Termination=SMD/SMT, Voltage Rating (DC)=50V, Weight=2.3E-05oz, Width=0.02inch
SW1 SW2: library part CMP-03913-99472344-1, "450404015514 Slide Switch, 0.3A, 5Vdc, Smd Rohs Compliant: Yes", Current Rating=300mA, Insulation Resistance=100MΩ, Max Operating Temperature=85°C, Min Operating Temperature=-40°C, Voltage Rating=5V, Contact Plating=Silver, NexarPartId=99472344, Packaging="Tape and Reel", RoHS=Compliant
SW3 SW4: library part CMP-05618-000010-1, "SWITCH TACTILE SPST-NO 0.05A 12V", Contact Current Rating=50mA, Contact Resistance=500mΩ, Manufacturer=Panasonic, Operating Force=1.6N, Temperature="-20°C to +70°C", Temperature Range High=+70°C, Temperature Range Low=-20°C, Voltage Rating DC=12V, Automotive=No, Category=Switch, ComponentLink2Description=Datasheet, ComponentLink2URL=https://www3.panasonic.biz/ac/e_download/control/switch/light-touch/catalog/sw_lt_eng_3529s_side.pdf?f_cd=402906&via=ok, Device Class L1=Electromechanical, Device Class L2=Switches, Device Class L3="Tactile Switches", Digikey Description="SWITCH TACTILE SPST-NO 0.05A 12V", Electromechanical Life=100000Cycles, Height=1.55mm, Lead Free=Yes, Manufacturer Part Number=EVQ-9P701P, Mouser Description="Tactile Switches SMD 3.5X2.9MM SID-OP L SHAPED TERM 1.6N", Octopart=https://octopart.com/evq-9p701p-panasonic-58006746, Package=EVQ-9P701P, RoHS=TRUE, Throw Configuration=SPST-NO
SW5: library part CMP-08834-000005-1, "SWITCH TACTILE SPST-NO 0.05A 12V", Ambient Temperature Range High=+70°C, Ambient Temperature Range Low=-25°C, Contact Current Rating=50mA, Contact Resistance=100mΩ, Manufacturer=Omron, Manufacturer Part Number=B3U-1000P-B, Operating Force=1.5N, Package=0, Temperature="-25°C to +70°C", Voltage Rating DC=12V, Automotive=No, Category=Switch, ComponentLink2Description=Datasheet, ComponentLink2URL=https://omronfs.omron.com/en_US/ecb/products/pdf/en-b3u.pdf, Device Class L1=Electromechanical, Device Class L2=Switches, Device Class L3="Tactile Switches", Digikey Description="SWITCH TACTILE SPST-NO 0.05A 12V", Electromechanical Life=200000Cycles, Height=1.75mm, Lead Free=Yes, Mount="Surface Mount", Mouser Description="Tactile Switches Top Actuated with boss w/o ground", Octopart=https://octopart.com/b3u-1000p-b-omron-1057356, RoHS=TRUE, Temperature Range High=+70°C, Temperature Range Low=-25°C, Throw Configuration=SPST-NO
U1: library part CMP-0133-00143-2, "IC CONTROLLR LI-ION 4.2V SOT23-5", Case/Package=SOT-23, Drain To Source Resistance=350mR, Max Charge Current=500mA, Max Input Voltage=6V, Max Operating Temperature=85°C, Max Output Voltage=4.5V, Max Power Dissipation=1.54W, Min Operating Temperature=-40°C, Min Output Voltage=4.168V, Min Supply Voltage=3.75V, Output Voltage=4.2V, Voltage Rating=4.534V, Contact Plating=Tin, Height=0.051inch, Lead Free="Lead Free", Length=0.122inch, Max Supply Voltage=6V, Mount="Surface Mount", Number of Cells=1, Number Of Channels=1, Number of Outputs=1, Number of Pins=5, Output Current=500mA, Packaging="Tape and Reel", Radiation Hardening=No, REACH SVHC="No SVHC", Termination=SMD/SMT, Weight=0.00709oz, Width=0.071inch
U2: "No Description Available", Mfr_Name="Texas Instruments", RefDes=RefDes, Type=TYPE
U3: library part CMP-00252-122240563-1, "ATTINY3224-XU Microcontroller 8-Bit AVR RISC 32KB Flash 1.8V to 5.5V 14-Pin TSSOP Tube", NexarPartId=122240563
U4: library part CMP-0254-00377-1, "Extremely Accurate I2C-Integrated Real-Time Clock/TCXO/Crystal, 16-Pin SO, -40 to 85 degC, Reel", Code_IPC=SOIC127P1030-16, Code_JEDEC=MS-013-AA, ComponentLink1Description="Manufacturer URL", ComponentLink1URL=http://www.maxim-ic.com, ComponentLink2Description=Datasheet, ComponentLink2URL=http://datasheets.maxim-ic.com/en/ds/DS3231.pdf, ComponentLink3Description="Package Specification", ComponentLink3URL=http://pdfserv.maxim-ic.com/package_dwgs/21-0042.PDF, DatasheetVersion="Rev 8, Jul-2010", PackageDescription="16-Pin Small-Outline IC, Wide (0.3in), 1.27 mm Pitch, SOIC (W)", PackageReference=W16-H2, PackageVersion="revD, 2010"
U5: library part CMP-00256-A.5, "Hosyond 5 Pcs 0.96 Inch OLED I2C Display Module 128x64 Pixel OLED Display", Amazon Link=https://www.amazon.com/dp/B09C5K91H7?ref=ppx_yo2ov_dt_b_product_details&th=1

## Free pads (board coordinates)
  round 137.79 hole 78.74: 7(7170,2437.57) 7(7170,4015) 7(7716.38,2437.57) 7(7716.38,4015)
  round 100 smd: 8(6750,2835) 8(7960,2610)

## Via types
v1: diameter 28, hole 15, Top Layer to Bottom Layer, tented both sides, 62 vias
v2: diameter 35.43, hole 23.62, Top Layer to Bottom Layer, 4 vias

## Nets (pads, with @x,y where several pads share a name; then routed paths per layer and width w, separated by ;. In a path a pad name is that pad's centre, name@x,y a point inside that pad or via, vN(x,y) a via of type N, cw(c..) or ccw(c..) an arc to the next point about the centre after c; other vN are vias at no path point)
3V3: C3.1 C4.1 C6.2 C7.1 C8.2 C9.2 C10.2 D5.2 D6.1 pad.8@7960,2610 R6.2 R7.1 R9.2 R10.2 R15.2 R16.2 U2.5 U2.6 U2.7 U3.1 U4.2 U5.2 | length 5278.2
  Top Layer w12: U3.1 7327.24,3970.39 7383.43,3970.39 v1(7383.82,3970) 7497.33,3970 7523.84,3996.5 7535.17,3996.5 7545.67,4007 7576,4007 7671,3912 7767,3912 7790,3889 7838.1,3889 7867.5,3859.6 7867.5,3825.5 7973,3720 D5.2 8035.94,3657.72 7939.33,3561.11 v1(7939.33,3520) ; v1(7392.36,3525) 7392.36,3338.64 7725,3006 7866.68,3006 7973.72,2898.97 7973.72,2623.72 7960,2610 7694,2876 7529,2876 7478.53,2825.53 C4.1 7509,2739 7521,2751 7521,2824 7546,2849 7590,2849 7616,2823 7616,2720.33 R6.2 7530.11,2634.44 7530.11,2627.43 7523.67,2620.99 7520.14,2620.99 7519.06,2619.91 7513.11,2619.91 7510,2616.8 7510,2567 7477,2534 R7.1 7439.83,2562.61 7433.69,2568.76 U2.5 U2.6 U2.7
  Bottom Layer w12: v1(7383.82,3970) 7383.82,3888.94 C7.1 7375.67,3880.79 R9.2 7375.67,3740.24 7392.36,3723.54 v1(7392.36,3525) ; C8.2 7633.19,3432.36 7603.57,3461.98 7603.57,3499.27 R15.2 7592.83,3524.76 7647.17,3579.09 R10.2 ; C8.2@7650.61,3432.36 7666.26,3416.71 7666.26,3399.74 7704,3362 7768,3362 7782.78,3376.78 7782.78,3421.91 U4.2 7785,3541.13 D6.1@7741,3585.13 ; D6.1 7888.57,3585.53 7939.33,3534.76 v1(7939.33,3520)
BAT_VCC: C2.2 P1.1 SW1.COM U1.3 | length 1353.7
  Top Layer w12: P1.1 6939.88,2844.88 C2.2 7104.76,2844.88 7117.46,2857.58 7117.46,2903.46 7149,2935 7295.09,2935 7317,2913.09 7317,2842 7290.34,2815.34 7290.34,2813.09 U1.3@7282.06,2804.8 ; U1.3 U1.3@7282.06,2804.8 ; v1(7617,2903.68) 7500.74,2903.68 7401.87,2804.8 U1.3@7282.06,2804.8
  Bottom Layer w12: v1(7617,2903.68) 7744.16,2903.68 7851.42,2796.42 SW1.COM
BUCK_IN: C5.1 D1.2 Q1.2 U2.1 U2.2 U2.3 | length 864.6
  Top Layer w12: Q1.2 7269.84,2575.16 C5.1 7330.87,2570 7354.94,2594.07 U2.1 U2.2 U2.3 7394.31,2572.96 7374,2552.64 7374,2528 7395,2507 7484,2507 7559.42,2582.42 7559.42,2620.89 7591.54,2653 7739.28,2653 7792.28,2600 D1.2
BUILTIN: D4.2 U3.11 | length 280.7
  Top Layer w12: D4.2 7506.06,4036 v1(7553,4036) ; U3.11 7559.64,3894.5 7605.5,3894.5 v1(7606,3895)
  Bottom Layer w12: v1(7553,4036) 7586,4036 7606,4016 v1(7606,3895)
GND: C1.1 C2.1 C4.2 C5.2 C6.1 C7.2 C8.1 C9.1 C10.1 J1.1 J1.2 J1.3 J1.4 J1.A1-B12 J1.B1-A12 P1.2 P2.3 P3.2 pad.7 R1.2 R2.1 R3.1 R5.2 R8.1 R11.1 R13.2 SW2.L2 SW3.1 SW4.1 SW5.1 U1.2 U2.9 U2.10 U3.14 U4.5 U4.6 U4.7 U4.8 U4.9 U4.10 U4.11 U4.12 U4.13 U4.14 U5.1 | length 483
  Top Layer w12: v1(7190,3605) v1(7288.82,3605) ; v1(7191,3526) 7192,3525 v1(7290,3525) ; v1(7192,3682) 7292.47,3682 U5.1 ; v1(7329,2649) U2.10 U2.9 ; v1(7559,3982) 7559,3970.91 U3.14 ; R8.1 v1(7565,2823) ; v1(7835,3065.87) v1(7935,3065.87)
  other v1: 7275,2633.14 6782.83,2655 7010.67,2730 7419.47,2739 7270,2767.4 7280,2880 8019.29,2917.64 7090,2955.12 7885,3065.87 6850,3067.83 8108.46,3150.21 6850,3395 8075,3602.93 6777.09,3640
NetC3_2: C3.2 R6.1 R8.2 U2.8 | length 290.1
  Top Layer w12: U2.8 7394.31,2662.59 7404.52,2672.8 7481.9,2672.8 C3.2@7510,2644.7 ; C3.2 C3.2@7510,2644.7 ; R8.2 7564.92,2765 7554,2754.08 7554,2700 7548.52,2694.52 7548.52,2683.22 C3.2@7510,2644.7
NetD2_1: D2.1 Q1.1 R2.2 | length 335.3
  Top Layer w12: v1(6887.17,2655) 6939.41,2655 6962.44,2631.97 D2.1
  Bottom Layer w12: v1(6887.17,2655) 6967.01,2575.16 v1(7102.6,2575.16)
NetD3_1: D3.1 R4.2 | length 197
  Top Layer w12: D3.1 6949,2981 7005,2925 R4.2
NetD4_1: D4.1 R11.2
  other v1: 7382.83,4045
NetD5_1: D5.1 R12.1 | length 120.6
  Bottom Layer w12: R12.1 8092.17,3800.24 8150.99,3741.41 8150.99,3723.06 v1(8154.06,3720)
NetD7_1: D7.1 R13.1 | length 200.8
  Bottom Layer w12: v1(6755,3319.06) 6722.7,3351.35 6722.7,3427.3 6768.24,3472.83 R13.1
NetJ1_A5: J1.A5 R1.1 | length 107.8
  Bottom Layer w12: v1(6850,3172.17) 6854.33,3172.17 6857.95,3175.79 J1.A5
NetJ1_B5: J1.B5 R5.1 | length 107.7
  Bottom Layer w12: v1(6850,3290.67) 6854.33,3290.67 6857.56,3293.9 J1.B5
NetP3_1: P3.1 R14.2 | length 161.6
  Bottom Layer w12: P3.1 7805.1,3761.9 7838.27,3761.9 R14.2
NetQ1_3: Q1.3 SW1.L1 | length 907.4
  Top Layer w12: Q1.3 7140,2648.19 7149.79,2657.98 7153.13,2657.98 7181.16,2686 7309,2686 7363,2740 v1(7363,2772) ; v1(7406,2890) 7444.68,2928.68 7667.32,2928.68 7673.56,2922.44 7753.62,2922.44 7761.53,2914.53 v1(7859.29,2914.53)
  Bottom Layer w12: v1(7363,2772) 7363,2847 v1(7406,2890)
NetR7_2: R7.2 U2.4 | length 68.2
  Top Layer w12: R7.2 7408.17,2562.77 7414,2568.6 U2.4
PA2: SW4.2' U3.12 | length 1088.3
  Top Layer w12: v2(6717.05,3484.49) 6717.05,3497.28 6734.67,3514.91 6734.67,3525.67 6747,3538 6813,3538 7018,3743 7406,3743 7444,3781 7444,3870 7493.59,3919.59 U3.12
PA3: SW2.COM U3.13 | length 1554
  Top Layer w12: U3.13 7605.82,3945.18 v1(7663,3888) ; v1(7994,3574) 7994,3573.49 8071.44,3496.05 8112.79,3496.05 8140,3468.84 8140,3447 8027.98,3334.98 8027.98,2952.45 8036.22,2944.21 8043.71,2944.21 8051.94,2935.97 8051.94,2883.36 8027.17,2858.58 SW2.COM
  Bottom Layer w12: v1(7663,3888) 7757.29,3888 7777.27,3868.02 7777.27,3821.9 7805.06,3794.11 7875.3,3794.11 7894,3775.41 7894,3674 v1(7994,3574)
PA4: R12.2 U3.2 | length 994.3
  Top Layer w12: U3.2 7279.82,3945.18 7270,3955 7270,4017 7336,4083 7557,4083 7613.07,4026.93 7613.07,3999.93 7684,3929 7823,3929 7935,3817 v1@7988,3817
  other v1: 7987.83,3815
PA5: SW3.2' U3.3 | length 2052.1
  Top Layer w12: v1(7265,3336) 7341,3412 7341,3532 7438,3629 v1(7438,3739) ; U3.3 7400.08,3919.59 7418.67,3901 v1(7423,3901) ; v1(8060,3226) 8101.57,3226 8168.5,3292.93 v2(8168.5,3305.72)
  Bottom Layer w12: v1(7265,3336) 7295.91,3336 7687.52,2944.39 7808.83,2944.39 7870.46,3006.02 7895.14,3006.02 7910,3020.88 7910,3142 7994,3226 v1(8060,3226) ; v1(7423,3901) 7423,3860.4 7409,3846.4 7409,3768 v1(7438,3739)
PA6: R16.1 U3.4 U4.3 | length 2249.7
  Top Layer w12: v1(6987,3812) 6987,3855.1 7041.9,3910 7214,3910 7230,3894 U3.4 ; v1(7835,3424.13) 7835,3164 v1(7860,3139)
  Bottom Layer w12: v1(6987,3812) 6987,3671 7375,3283 7377,3283 7696,2964 7798.86,2964 7860,3025.14 v1(7860,3139) ; v1(7835,3424.13) R16.1
PA7: R15.1 U3.5 U4.1 | length 1873.7
  Top Layer w12: U3.5 7328.6,3866.66 7363.97,3866.66 7371,3859.63 7371,3798 7352.13,3779.13 7333.13,3779.13 v1(7332,3778) ; v1(7735,3424.13) 7735,3214 v1(7810,3139)
  Bottom Layer w12: v1(7332,3778) 7299,3778 7234,3713 7234,3453 7704,2983 7789,2983 7810,3004 v1(7810,3139) ; R15.1 7697.17,3495.24 7735,3457.4 v1(7735,3424.13)
PROG: R3.2 U1.5 | length 67.1
  Top Layer w12: R3.2 U1.5
RTC_RST: SW5.2 U4.4 | length 208.6
  Top Layer w12: v1(7885,3424.13) 8012.35,3424.13 8057.28,3469.07 SW5.2
RXD: P2.2 U3.6 | length 325.4
  Top Layer w12: P2.2 7080.5,3888.5 7190.95,3888.5 7236.63,3842.82 U3.6
SCL: R9.1 U3.9 U4.16 U5.3 | length 931.4
  Top Layer w12: v1(7480,3755) 7480,3791.04 7528.92,3839.96 7556.28,3839.96 U3.9
  Bottom Layer w12: v1(7480,3755) 7486.59,3748.41 7486.59,3687.88 U5.3 7493.19,3341.14 7735,3099.33 U4.16
SDA: R10.1 U3.8 U4.15 U5.4 | length 899.6
  Top Layer w12: v1(7542.83,3755) 7542.83,3814.37 7545.69,3817.23 U3.8
  Bottom Layer w12: v1(7542.83,3755) 7542.83,3740.24 7593.19,3689.88 U5.4 7593.19,3595.19 7553,3555 7553,3330 7785,3098 U4.15
STAT: R4.1 U1.1 | length 289.4
  Bottom Layer w12: v1(7005,2788.83) 7070.17,2788.83 7090,2769 7195,2769 7234,2730 v1(7270,2730)
TXD: P2.1 U3.7 | length 200.8
  Top Layer w12: P2.1 7209.41,3846 7238.18,3817.23 U3.7
UPDI: D6.2 R14.1 U3.10 | length 394.2
  Top Layer w12: U3.10 7599.06,3868.41 v1(7741,3726.47)
  Bottom Layer w12: v1(7741,3726.47) 7763.96,3703.51 7763.96,3682.04 7799.17,3646.83 R14.1
USB_VCC: C1.2 D1.1 D2.2 D3.2 D7.2 J1.A4-B9 J1.B4-A9 pad.8@6750,2835 U1.4 | length 2471.2
  Top Layer w12: v1(6755,3200.94) 6751.06,3200.94 6729.5,3179.39 6729.5,3175.45 6719,3164.94 6719,3039 6734.53,3023.47 6734.53,2991.41 D3.2 6750,2975.94 6750,2835 6750,2773 6840,2683 6840,2623 6868,2595 6984.53,2595 7017.56,2628.03 D2.2 7017.56,2631.97 7068,2682.41 7068,2766 7106.8,2804.8 U1.4@7174.73,2804.8 ; v1(7169.76,2880) 7169.76,2809.77 U1.4@7174.73,2804.8 ; U1.4 U1.4@7174.73,2804.8
  Bottom Layer w12: v1@6755,3199 6809,3145 6920.96,3145 6929.64,3136.32 6950.53,3136.32 J1.A4-B9 6962.15,3136.32 6980.66,3136.32 6989.98,3145.64 6989.98,3304.36 6980.66,3313.68 6962.15,3313.68 J1.B4-A9 ; v1(7169.76,2880) 7246.76,2957 7519,2957 7640.71,2835.29 v1(7640.71,2600)
pads on no net: J1. J1.A6 J1.A7 J1.A8 J1.B6 J1.B7 J1.B8 SW1.L2 SW1.M1 SW1.M2 SW1.M3 SW1.M4 SW1.M5 SW1.M6 SW2.L1 SW2.M1 SW2.M2 SW2.M3 SW2.M4 SW2.M5 SW2.M6 SW3.1' SW3.2 SW4.1' SW4.2 SW5.
copper on no net:
  other v2: 8168.5,3146.28 6717.05,3643.94

## Polygon pours and split planes (outlines as drawn)
GND on Bottom Layer "NONET_L02_P-001" (solid, pour order 0): 6628.5,4143 8253.5,4143 8253.5,2318 6628.5,2318

## Silkscreen, mask and mechanical layers (free items; w line width, h text height)
Top Overlay:
  text "RX" at 7059,3912.5 h25
  text "UPDI" at 7651,3907.5 h25
  text "GND" at 7761,3907.5 h25
  text "TX" at 7208,3872.5 h25
  text "PROG" at 7899.18,3852.5 h25
  text "UART" at 6774.18,3832.5 h25
  text "3V3" at 8011.68,3761 h25
  text "GND" at 6831,3752.5 h25
  text "SET" at 6689.68,3680.5 h25
  text "RTC RST" at 8021.69,3632.5 h25
  text "WAKE/" at 8086.69,3397.5 h25
  text "/TICK" at 8083.77,3356 h25
  text "DISPLAY" at 7250.06,3195.01 h60
  text "USB" at 6721.68,3132.5 h25
  text "5V0" at 6721.68,3092.5 h25
  text "IND ENA" at 8018.78,3011 h25
  text "CHGING" at 6710.27,2910.01 h25
  text "ON" at 8169.17,2877.5 h25
  text "USB" at 6716.68,2747.5 h25
  text "5V0" at 6716.68,2707.5 h25
  text "3V3" at 8021.68,2597.5 h25
  text "3224 LiPo" at 7294.49,2455.57 h35
  text "Watch" at 7364.46,2404.58 h35
  text "V2" at 7422.17,2358.01 h25
Bottom Overlay:
  lines w10: 6945,2605 7815,2605 7815,3005 6945,3005 6945,2605
  text "RTC IC" at 8123.73,3482.5 h25
  text "USB-C" at 6973.31,3477.5 h25
  text "PWR" at 6973.32,3437.5 h25
  text "Designed by:" at 7667,3197 h30
  text "Nicholas Niles" at 7665,3119.51 h45
  text "https://nicholasniles.com/" at 7669,3068.67 h25
  text "BAT" at 6898.32,2942.5 h25
  text "BAT-" at 6794,2857.5 h25
  text "ON" at 8120.83,2827.5 h25
  text "LiPo BATTERY" at 7724.89,2775.01 h60
  text "BAT+" at 6794,2757.5 h25
  text "BAT ENA" at 8027,2617.5 h25
Mechanical 1:
  the board outline again, w10